# EAGLE board connector (EAGLE 8.3.2)
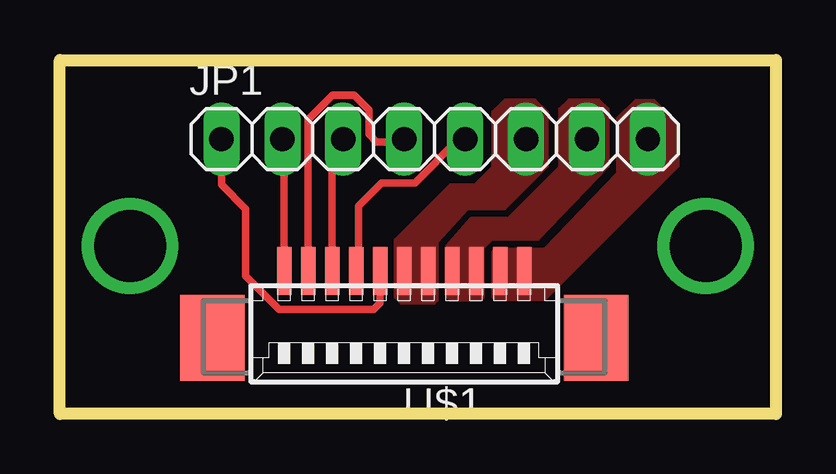
[diagram p0: board, top side]

Size 29.84 x 14.76 mm. Coordinates in mm from the lower left corner, seen from the top.
Outline: 0,14.76 29.84,14.76 29.84,0 0,0 0,14.76
Copper layers (1*16): Top 0.035mm / dielectric 1.5mm / Bottom 0.035mm
Design rules "default": minimum track width 6mil, minimum drill 0.35mm, track to track 6mil, track to pad 6mil, pad to pad 6mil, via to via 6mil, smd to smd 6mil, copper to edge 40mil, drill to drill 6mil, minimum pad ring 10mil, minimum via ring 8mil, stop-mask expansion 4mil, vias tented up to drill 0mil, thermal gap 10mil

## Footprints (pad centres in the part's own frame; a part is rotated, then mirrored left to right if it is on the bottom)
1X08 = drill 1.016 long: 1 -8.89,0; 2 -6.35,0; 3 -3.81,0; 4 -1.27,0; 5 1.27,0; 6 3.81,0; 7 6.35,0; 8 8.89,0
GEN3CON = smd 0.61 x 2: 1 5,-2; 2 4,-2; 3 3,-2; 4 2,-2; 5 1,-2; 7 -1,-2; 8 -2,-2; 9 -3,-2; 10 -4,-2; 11 -5,-2 | smd 0.6 x 2: 6 0,-2 | smd 2.68 x 3.6: S1 8,0.8; S2 -8,0.8

## Placement (x,y rotation side)
JP1  [1X08]  15.62,11.46 0 top
U$1  MOTORCON  [GEN3CON]  14.35,3.97 180 top

## Library data of the parts
JP1 = pinhead
U$1 = gen3

## Nets
M1: JP1.8 U$1.10 U$1.11
M2: JP1.7 U$1.8 U$1.9
M3: JP1.6 U$1.6 U$1.7
N$3: JP1.5 U$1.4
N$4: JP1.1 U$1.5
N$5: JP1.4 U$1.2
N$6: JP1.3 U$1.3
N$7: JP1.2 U$1.1

## Tracks (layer width: path | path; a pad name or v marks a point on that pad's centre or on a via)
M1
  pour Top (no thermals): 25.78,12.1 25.78,10.32 20.19,4.73 18.16,4.73 18.03,4.86 18.03,6.76 18.16,6.89 20.19,6.89 23.24,10.06 23.24,12.35 24,13.11 24.77,13.11
M2
  pour Top (no thermals): 16.13,4.86 16.26,4.73 17.53,4.73 17.65,4.86 17.65,6.89 18.03,7.27 19.94,7.27 22.86,10.32 22.86,12.73 22.48,13.11 21.21,13.11 20.83,12.73 20.83,10.32 18.67,8.16 17.14,8.16 16.13,7.01
M3
  pour Top (no thermals): 13.97,4.86 14.22,4.6 15.62,4.6 15.75,4.73 15.75,7.14 17.02,8.54 18.54,8.54 20.32,10.32 20.32,12.6 19.81,13.11 18.54,13.11 18.03,12.6 18.03,10.32 17.27,9.55 16.26,9.55 13.97,7.27
N$1  (via drill 3 pad 0.4)
  other vias: 26.92,7
N$2  (via drill 3 pad 0.4)
  other vias: 2.92,7
N$3
  Top 0.305: JP1.5 16.62,11.46 14.79,9.63 13.41,9.63 12.45,8.67 12.45,6.06 U$1.4
N$4
  Top 0.305: U$1.5 13.35,4.62 13.08,4.35 9.14,4.35 7.75,5.74 7.75,8.54 6.73,9.55 JP1.1
N$5
  Top 0.305: U$1.2 10.35,12.27 11.37,13.29 12.25,13.29 12.88,12.66 12.88,11.66 13.21,11.33 14.22,11.33 JP1.4
N$6
  Top 0.305: U$1.3 11.35,11 JP1.3
N$7
  Top 0.305: U$1.1 9.35,11.38 JP1.2